# Altium PCB v29_test.PcbDoc
Units mm, origin at the board's own origin, x right, y up, seen from the top; angles counter-clockwise.
Board outline 76.2 x 76.2 mm, 2 copper layers (Top Layer, Bottom Layer), stack 1.214 mm thick; 54 components, 31 nets, 194 pads, 85 vias.
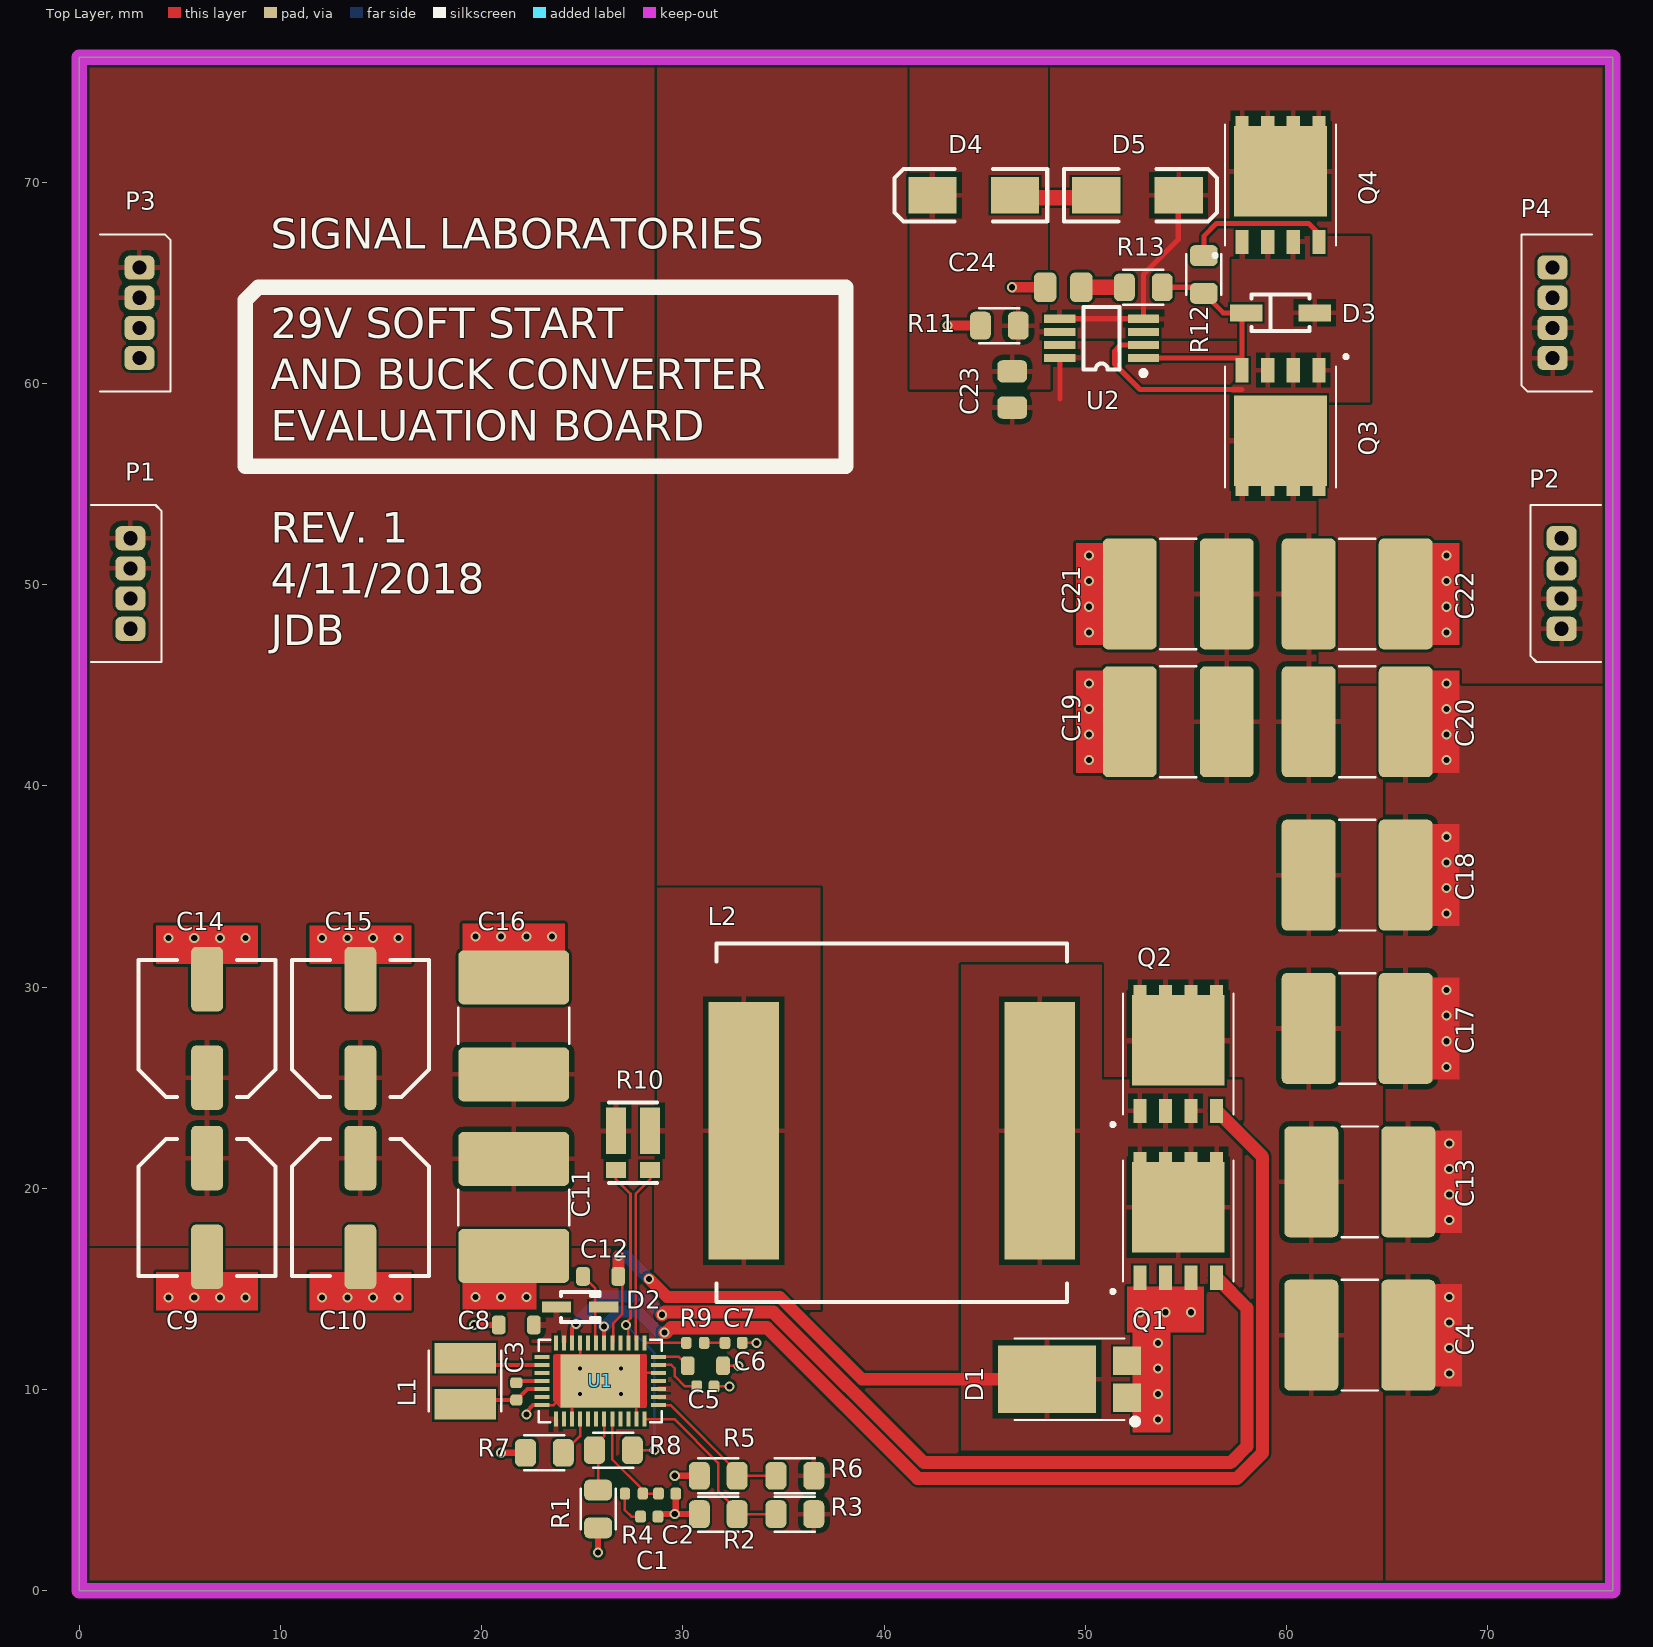
[diagram p0: Top Layer view]
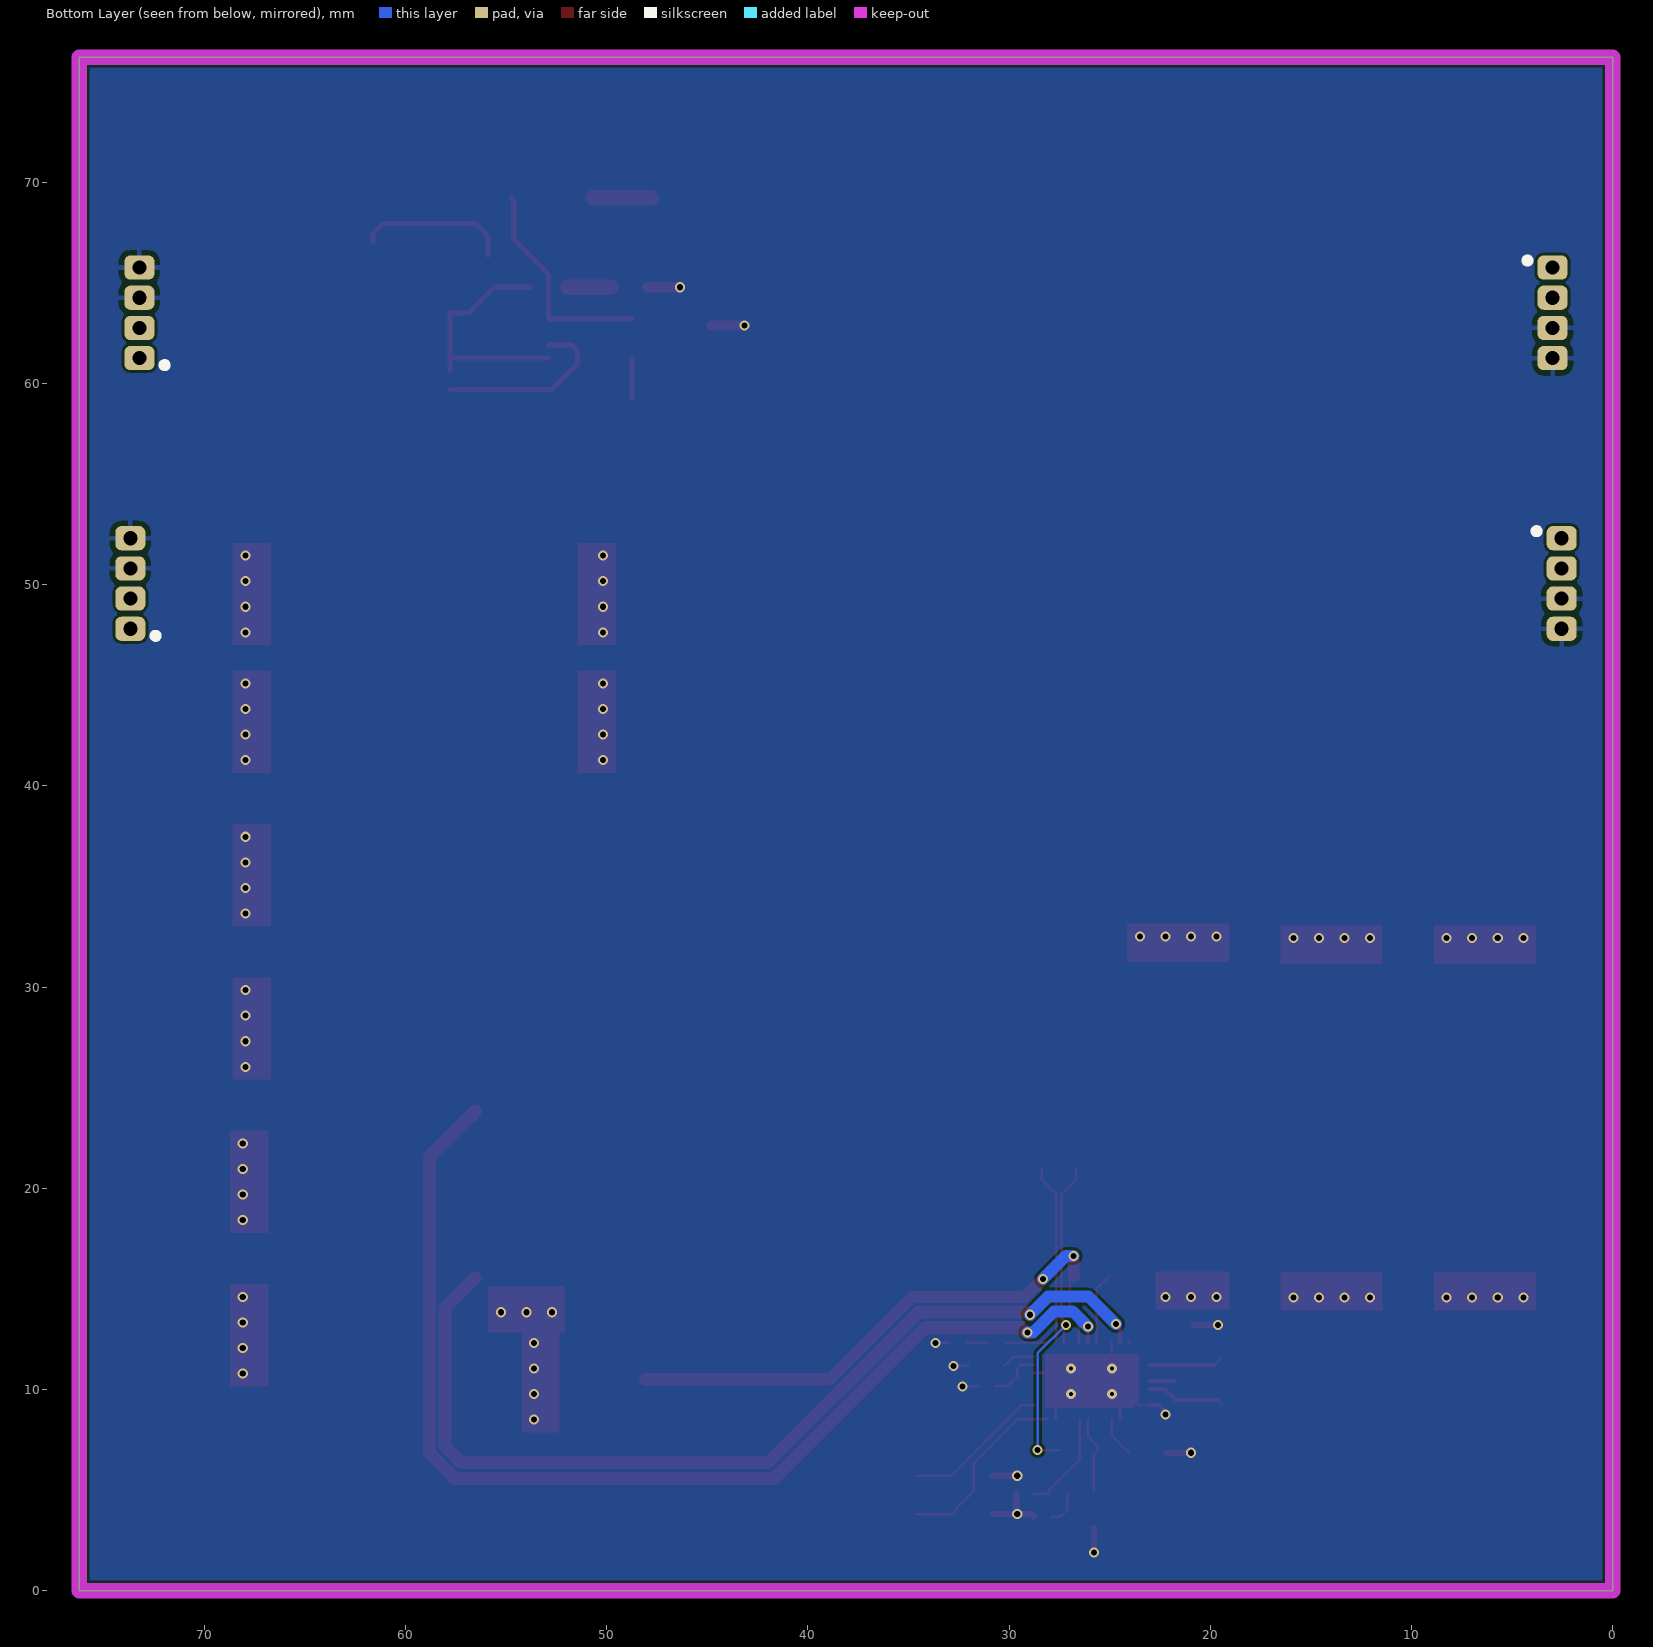
[diagram p1: Bottom Layer view, seen from below]
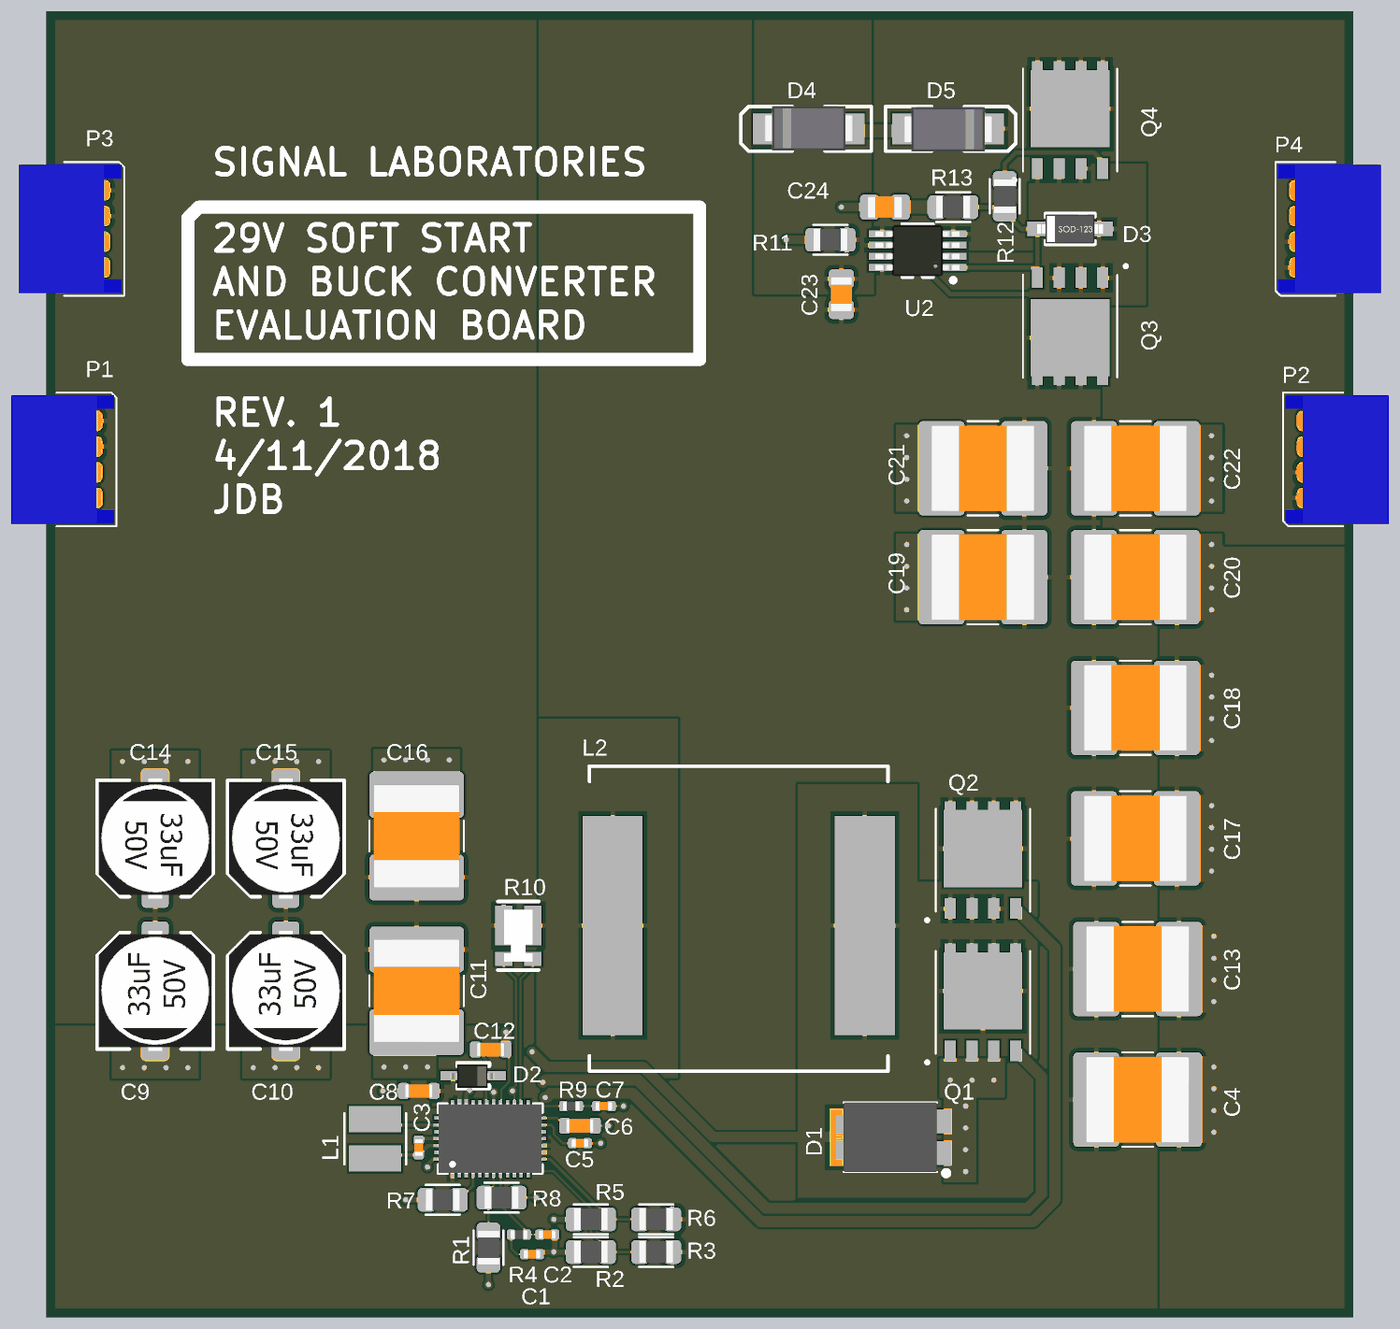
[diagram p2: 3D render of the assembled board from above, using the file's embedded part models]

## Layer stack, top to bottom
Top Solder: solder mask 0.0102, Solder Resist, Dk 3.5
Top Layer: signal copper 0.0356
Dielectric1: core 1.143, FR-4, Dk 4.8
Bottom Layer: signal copper 0.0356
Bottom Solder: solder mask 0.0102, Solder Resist, Dk 3.5

## Board outline
0,0 76.2,0 76.2,76.2 0,76.2

## Design rules (kind name [scope] priority, off if disabled: settings)
Clearance [All] p1: gap=0.127 ignorepadtopadclearanceinfootprint=FALSE except(0: Arc-Hole Track-Hole SMDPad-Hole THPad-Hole Via-Hole Fill-Hole Poly-Hole Region-Hole Text-Hole)
ComponentClearance [All] p1 off: gap=0.254 collisioncheckmode=3 verticalgap=0.254 showdistances=FALSE
DiffPairsRouting [All] p1: maxlimit=0.254 minlimit=0.127 mostfreqgap=0.127 toplayer_minwidth=0.127 toplayer_maxwidth=0.381 toplayer_prefwidth=0.127 bottomlayer_minwidth=0.127 bottomlayer_maxwidth=0.381 bottomlayer_prefwidth=0.127 maxuncoupledlength=12.7
HoleSize [All] p1: absolutevalues=TRUE maxlimit=25.4 minlimit=0.2 maxpercent=80.000 minpercent=20.000
MinimumSolderMaskSliver [All] p1: minsoldermaskwidth=0.1
PolygonConnect PolygonConnect_1 [IsVia] p1: connectstyle=Direct reliefconductorwidth=0.254 reliefentries=4 polygonreliefangle="90 Angle" airgapwidth=0.254
PolygonConnect [All] p2: connectstyle=Relief reliefconductorwidth=0.254 reliefentries=4 polygonreliefangle="90 Angle" airgapwidth=0.254
RoutingVias [All] p1: holewidth=0.2 width=0.5 viastyle="Through Hole" minholewidth=0.2 minwidth=0.5 maxholewidth=0.711 maxwidth=1.27
SilkToSilkClearance [All] p1 off: silktosilkclearance=0.254
SilkToSolderMaskClearance SilkscreenOverComponentPads [IsPad] p1 off: minsilkscreentomaskgap=0.254 clearancetoexposedcopper=TRUE
SolderMaskExpansion [All] p1: expansion=0.05
Width [All] p1: maxlimit=500 minlimit=0.127 preferedwidth=0.127
24 further rules are at their usual default settings.

## Classes and differential pairs
differential pair SENSE: +SENSE_P -SENSE_N

## Components (designator, comment, footprint, x,y, rotation, side; value= is the part's Value field where it differs from the comment)
C1 "GRM1555C1H102JA01" CAPC100X50X55L25N 28.321,3.683 r0 top value=1nF (schematic designator C21)
C2 "GRM1555C1H101JA01" CAPC100X50X55L25N 29.21,4.826 r180 top value=100pF (schematic designator C20)
C3 "GRM155R61A105KE15" CAPC100X50X55L25N 21.717,9.906 r90 top value=1uF (schematic designator C11)
C4 "CKG57NX7S2A226M500JJ" CAPC600X500X500L160N 63.63,12.7 r180 top value=22uF (schematic designator C2)
C5 "C0402C222J3GACTU" CAPC100X50X55L25N 31.115,10.16 r0 top value=2.2nF (schematic designator C22)
C6 "VJ0402A101KXA" CAPC160X80X90L20N 31.115,11.176 r0 top value=100pF (schematic designator C23)
C7 "GRM155R71H471JA01" CAPC100X50X55L25N 32.512,12.319 r180 top value=470pF (schematic designator C24)
C8 "TMK212B7475KG" CAPC160X80X90L20N 21.717,13.208 r180 top value=4.7uF (schematic designator C12)
C9 "EEE-FTH101XAP" CAPAE660X800D700L260X65N 6.35,19.05 r270 top value=100uF (schematic designator C16)
C10 "EEE-FTH101XAP" CAPAE660X800D700L260X65N 13.97,19.05 r270 top value=100uF (schematic designator C19)
C11 "CKG57NX7S1H226M500JJ" CAPC600X500X500L160N 21.59,19.05 r90 top value=22uF (schematic designator C15)
C12 "UMK212B7105KG" CAPC160X80X90L20N 25.908,15.621 r0 top value=1uF (schematic designator C13)
C13 "CKG57NX7S2A226M500JJ" CAPC600X500X500L160N 63.63,20.32 r180 top value=22uF (schematic designator C5)
C14 "EEE-FTH101XAP" CAPAE660X800D700L260X65N 6.35,27.94 r90 top value=100uF (schematic designator C17)
C15 "EEE-FTH101XAP" CAPAE660X800D700L260X65N 13.97,27.94 r90 top value=100uF (schematic designator C18)
C16 "CKG57NX7S1H226M500JJ" CAPC600X500X500L160N 21.59,28.07 r270 top value=22uF (schematic designator C14)
C17 "CKG57NX7S2A226M500JJ" CAPC600X500X500L160N 63.5,27.94 r180 top value=22uF (schematic designator C4)
C18 "CKG57NX7S2A226M500JJ" CAPC600X500X500L160N 63.5,35.56 r180 top value=22uF (schematic designator C9)
C19 "CKG57NX7S2A226M500JJ" CAPC600X500X500L160N 54.61,43.18 r0 top value=22uF (schematic designator C8)
C20 "CKG57NX7S2A226M500JJ" CAPC600X500X500L160N 63.5,43.18 r180 top value=22uF (schematic designator C6)
C21 "CKG57NX7S2A226M500JJ" CAPC600X500X500L160N 54.61,49.53 r0 top value=22uF (schematic designator C3)
C22 "CKG57NX7S2A226M500JJ" CAPC600X500X500L160N 63.5,49.53 r180 top value=22uF (schematic designator C7)
C23 "VJ0805Y473KXB" CAPC200X125X145L45N 46.355,59.69 r90 top value=47nF (schematic designator C1)
C24 "VJ0805Y473KXB" CAPC200X125X145L45N 48.895,64.77 r180 top value=47nF (schematic designator C10)
D1 "SBR10U200P5-13" DIODES_POWERDI5 49.214,10.51 r90 top (schematic designator D5)
D2 "1N4448HWS-7-F" SOD323 24.892,14.097 r0 top (schematic designator D4)
D3 "DDZ12BQ-7" SOD123 59.69,63.5 r180 top (schematic designator D2)
D4 "SMAJ24A-13-F" SMA 44.45,69.342 r180 top (schematic designator D3)
D5 "SMAT70A-13-F" SMA 52.578,69.342 r0 top (schematic designator D1)
L1 "ME3220-333KL" ME3220 19.177,10.414 r90 top value=33uH
L2 "HCM1A1707-680-R" HCM1A1707 40.37,23.26 r180 top value=68uH
P1 "S4B-ZR" S4B-ZR 2.09,50.05 r90 top (schematic designator P3)
P2 "S4B-ZR" S4B-ZR 74.11,50.05 r270 top
P3 "S4B-ZR" S4B-ZR 2.54,63.5 r90 top (schematic designator P4)
P4 "S4B-ZR" S4B-ZR 73.66,63.5 r270 top (schematic designator P1)
Q1 "BSC190N15NS3" TDSON-8 54.61,18.375 r0 top (schematic designator Q4)
Q2 "BSC190N15NS3" TDSON-8 54.61,26.67 r0 top (schematic designator Q3)
Q3 "BSC190N15NS3" TDSON-8 59.69,57.825 r180 top (schematic designator Q2)
Q4 "BSC190N15NS3" TDSON-8 59.69,69.85 r0 top (schematic designator Q1)
R1 "RT0805BRD0711K5L" RESC2012X70N 25.781,4.064 r90 top value=11.5k (schematic designator R11)
R2 "RG2012P-103-B-T5" RESC2012X70N 31.75,3.81 r0 top value=10k (schematic designator R7)
R3 "RT0805BRD07430KL" RESC2012X70N 35.56,3.81 r0 top value=430k (schematic designator R4)
R4 "ERJ-2RKF2212X" RESC1005X40N 27.559,4.826 r0 top value=22.1K (schematic designator R12)
R5 "RG2012P-153-B-T5" RESC2012X70N 31.75,5.715 r0 top value=15k (schematic designator R8)
R6 "RT0805BRD07357KL" RESC2012X70N 35.56,5.715 r0 top value=357k (schematic designator R5)
R7 "RT0805BRD0749R9L" RESC2012X70N 23.114,6.858 r180 top value=49.9 (schematic designator R10)
R8 "PTN0805E2553BST1" RESC2012X70N 26.543,6.985 r180 top value=255k (schematic designator R9)
R9 "ERJ-2RKF2672X" RESC1005X40N 30.607,12.319 r0 top value=26.7K (schematic designator R13)
R10 "CST0612-FC-R002E" CST0612 27.52,22.26 r0 top value=0.002 (schematic designator R6)
R11 "RC0805FR-071KL" RESC2012X70N 45.72,62.865 r0 top value=1k (schematic designator R3)
R12 "RC0805FR-0710RL" RESC2012X70N 55.88,65.405 r90 top value=10 (schematic designator R1)
R13 "RC0805FR-0710KL" RESC2012X70N 52.875,64.77 r0 top value=10k (schematic designator R2)
U1 "LT3840EUFE" QFN39P40_600X400X80L40X20T465X265N 25.886,10.424 r0 top (schematic designator U2)
U2 "LTC4359HMS8" MSOP8 50.8,62.23 r90 top (schematic designator U1)

## Footprints (in the part's own frame and the unit in brackets; to place one, negate y for a bottom-side part, rotate by r counter-clockwise, add the part's x,y. Pads: shape width x height; smd on the part's side, far side on the other; paste and mask are expansions set on the pad)
CAPAE660X800D700L260X65N [mm] "Capacitor, Aluminum Electrolytic; 6.60 mm L X 6.60 mm W X 8.00 mm H body"
  rrect32% 3.21x1.58 smd: 1(-2.45,0) 2(2.45,0)
  silkscreen extent -3.4,-3.4 3.4,3.4, body extent -3.5,-3.3 3.5,3.3, height 8.54
CAPC100X50X55L25N [mm] "Capacitor, Chip; 1.00 mm L X 0.50 mm W X 0.55 mm H body"
  rrect52% 0.54x0.6 smd: 1(-0.43,0) 2(0.43,0)
  body extent -0.5,-0.25 0.5,0.25, height 0.55
CAPC160X80X90L20N [mm] "Capacitor, Chip; 1.60 mm L X 0.80 mm W X 0.90 mm H body"
  rrect50% 0.68x0.93 smd: 1(-0.875,0) 2(0.875,0)
  body extent -0.8,-0.4 0.8,0.4, height 0.9
CAPC200X125X145L45N [mm] "Capacitor, Chip; 2.00 mm L X 1.25 mm W X 1.45 mm H body"
  rrect45% 1.11x1.47 smd: 1(-0.9,0) 2(0.9,0)
  body extent -1,-0.63 1,0.63, height 1.45
CAPC600X500X500L160N [mm] "Capacitor, Chip; 6.00 mm L X 5.00 mm W X 5.00 mm H body"
  rrect19% 2.68x5.51 smd: 1(-2.41,0) 2(2.41,0)
  silkscreen extent -0.89,-2.75 0.89,2.75, body extent -3,-2.5 3,2.5, height 5
CST0612 [mm] "Current Sense Resistor"
  rect 1x2.3 smd mask+0.05: 1(-0.85,0.6) 2(0.85,0.6)
  rect 1x0.8 smd mask+0.05: 3(-0.85,-1.35) 4(0.85,-1.35)
  silkscreen extent -1.2,-2 1.2,2, body extent -0.82,-1.53 0.82,1.52, height 0.65
DIODES_POWERDI5 [mm] "Recifier; 2 pin, 4.05 mm L X 5.45 mm W X 1.15 mm H body"
  rect 1.4x1.39 smd mask+0.05: A(-0.92,-2.856) A(0.92,-2.856)
  rect 3.36x4.86 smd paste-4.86 mask+0: K(0,1.126)
  silkscreen extent -2.25,-3.4 2.02,2.73, body extent -2.02,-2.72 2.02,2.73, height 1.15
HCM1A1707 [mm] "Inductor, Powdered Iron, SMD"
  rect 3.5x12.8 smd: 1(-7.35,0.4) 2(7.35,0.4)
  silkscreen extent -8.7,-8.9 8.7,8.9, body extent -8.42,-8.6 8.42,8.6, height 7
ME3220 [mm] "SMT Power Inductor"
  rect 1.52x3.05 smd mask+0.05: 1(-1.145,0) 2(1.145,0)
  silkscreen extent -1.5,-1.8 1.5,1.8, body extent -1.6,-1.4 1.6,1.4, height 2
MSOP8 [mm] "MSOP8"
  rect 0.4x1.55 smd: 1(-0.975,-2.075) 2(-0.325,-2.075) 3(0.325,-2.075) 4(0.975,-2.075) 5(0.975,2.075) 6(0.325,2.075) 7(-0.325,2.075) 8(-0.975,2.075)
  silkscreen extent -1.85,-2.2 1.55,0.9, body extent -1.5,-2.45 1.5,2.45, height 1.15
QFN39P40_600X400X80L40X20T465X265N [mm] "Quad Flat No-Lead (QFN with Tab), 0.40 mm pitch; rect., 12 pin X 7 pin, 6.00 mm L X 4.00 mm W X 0.80 mm H body"
  rect 0.2x0.74 smd mask+0.05: 1(-2.2,-1.895) 2(-1.8,-1.895) 3(-1.4,-1.895) 4(-1,-1.895) 5(-0.6,-1.895) 6(-0.2,-1.895) 7(0.2,-1.895) 8(0.6,-1.895) 9(1,-1.895) 10(1.4,-1.895) 11(1.8,-1.895) 12(2.2,-1.895) 20(2.2,1.895) 21(1.8,1.895) 22(1.4,1.895) 23(1,1.895) 24(0.6,1.895) 25(0.2,1.895) 26(-0.2,1.895) 27(-0.6,1.895) 28(-1,1.895) 29(-1.4,1.895) 30(-1.8,1.895) 31(-2.2,1.895)
  rect 0.74x0.2 smd mask+0.05: 13(2.895,-1.2) 14(2.895,-0.8) 15(2.895,-0.4) 16(2.895,0) 17(2.895,0.4) 18(2.895,0.8) 19(2.895,1.2) 32(-2.895,1.2) 33(-2.895,0.8) 34(-2.895,0.4) 35(-2.895,0) 36(-2.895,-0.4) 37(-2.895,-0.8) 38(-2.895,-1.2)
  rect 3.95x2.65 smd paste-3.95 mask+0: 39(0,0)
  Top Layer region: 2.325,0 2.325,-1.225 2.324,-1.241 2.32,-1.256 2.314,-1.27 2.306,-1.284 2.296,-1.296 2.284,-1.306 2.27,-1.314 2.256,-1.32 2.241,-1.324 -1.975,-1.325 -2.325,-0.975 -2.325,1.225 -2.324,1.241 -2.32,1.256 -2.314,1.27 -2.306,1.284 -2.296,1.296 -2.284,1.306 -2.27,1.314 -2.256,1.32 -2.241,1.324 2.225,1.325 2.241,1.324 2.256,1.32 2.27,1.314 2.284,1.306 2.296,1.296 2.306,1.284 2.314,1.27 2.32,1.256 2.324,1.241 2.325,1.225 2.325,0
  silkscreen extent -3.05,-2.05 3.05,2.05, body extent -3.05,-2.05 3.05,2.05, height 0.8
RESC1005X40N [mm] "Resistor, Chip; 1.00 mm L X 0.50 mm W X 0.40 mm H body"
  rrect50% 0.51x0.6 smd: 1(-0.445,0) 2(0.445,0)
  body extent -0.5,-0.25 0.5,0.25, height 0.4
RESC2012X70N [mm] "Resistor, Chip; 2.00 mm L X 1.25 mm W X 0.70 mm H body"
  rrect50% 1.04x1.38 smd: 1(-0.94,0) 2(0.94,0)
  silkscreen extent -1,-0.87 1,0.87, body extent -1,-0.63 1,0.63, height 0.7
S4B-ZR [mm] "1.5mm pitch right angle 4-position"
  rrect50% 1.2x1.5 hole 0.7 paste-1.5 mask+0.05: 1(2.25,-0.45) 2(0.75,-0.45) 3(-0.75,-0.45) 4(-2.25,-0.45)
  silkscreen extent -3.9,-2 3.9,1.5, body extent -3.75,-1.85 3.75,4.15, height 3.7
SMA [mm] "DO-214-AC/SMA; 2 C-Bend Leads; Body 5 x 2.7 mm, inc. leads (LxW)"
  rect 2.4x1.8 smd: 1(-2.05,0) 2(2.05,0)
  silkscreen extent -3.65,-1.3 3.95,1.3, body extent -2.6,-1.33 2.6,1.27, height 2.4
SOD123 [mm] "SOD-123; 2 Leads; Body 2.7 x 1.6 mm, (LxW)"
  rect 1.6x0.85 smd: 1(-1.7,0) 2(1.7,0)
  silkscreen extent -1.45,-0.9 1.45,0.9, body extent -1.92,-0.85 1.92,0.85, height 1.45
SOD323 [mm] "SOD-323/SC-76; 2 Leads; Body 1.7 x 1.3 mm, (LxW)"
  rect 1.45x0.55 smd: A(-1.175,0) K(1.175,0)
  silkscreen extent -0.95,-0.75 0.95,0.75, body extent -1.35,-0.7 1.25,0.65, height 1.1
TDSON-8 [mm] "Power FET Package 5x6mm TDSON-8"
  rect 0.65x1.2 smd: 1(-1.905,-2.825) 2(-0.635,-2.825) 3(0.635,-2.825) 4(1.905,-2.825) 5(1.905,2.825) 5(1.905,2.825) 6(0.635,2.825) 7(-0.635,2.825) 8(-1.905,2.825)
  rect 4.6x4.5 smd: 9(0,0.675)
  silkscreen extent -3.3,-3.55 2.75,3, body extent -2.5,-3 2.5,3, height 1

## Part data
C1: library part CAP, "Ceramic Capacitor 1nF ±5% 50V NP0 0402", Manufacturer=Murata, Package=0402, Tolerance=±5%, Voltage=50V, Manufacturer P/N=GRM1555C1H102JA01, Tr=-55:125
C2: library part CAP, "Ceramic Capacitor 100pF ±5% 50V NP0 0402", Manufacturer=Murata, Package=0402, Tolerance=±5%, Voltage=50V, Manufacturer P/N=GRM1555C1H101JA01, Tr=-55:125
C3: library part CAP, "Ceramic Capacitor 1uF ±10% 10V X5R 0402", Manufacturer=Murata, Package=0402, Tolerance=±10%, Voltage=10V, Manufacturer P/N=GRM155R61A105KE15, Tr=-55:125
C4 C13 C17 C18 C19 C20 C21 C22: library part CAP, "Ceramic Capacitor 22uF ±20% 100V X7S Stacked", Manufacturer=TDK, Package=2220, Tolerance=±20%, Voltage=100V, Manufacturer P/N=CKG57NX7S2A226M500JJ, Tr=-55:125
C5: library part CAP, "Ceramic Capacitor 2.2nF ±5% 25V NP0 0402", Manufacturer=Kemet, Package=0402, Tolerance=±5%, Voltage=25V, Manufacturer P/N=C0402C222J3GACTU, Tr=-55:125
C6: "Ceramic Capacitor 100pF ±10% 50V C0G 0402", Manufacturer=Vishay, Package=0402, Tolerance=±10%, Voltage=50V, Manufacturer P/N=VJ0402A101KXA, pF=100, Tr=-55:150
C7: library part CAP, "Ceramic Capacitor 470pF ±5% 50V X7R 0402", Manufacturer=Murata, Package=0402, Tolerance=±5%, Voltage=50V, Manufacturer P/N=GRM155R71H471JA01, Tr=-55:125
C8: "Ceramic Capacitor 4.7uF ±10% 25V X7R 0805", Manufacturer="Taiyo Yuden", Package=0805, Tolerance=±10%, Voltage=25V, Manufacturer P/N=TMK212B7475KG, Notes="stock needs validation", pF=4700000
C9 C10 C14 C15: library part CAP_POL, "Aluminum Electrolytic Capacitor 100uF ±20% 50V", Manufacturer=Panasonic, Package="6.3mm Radial", Tolerance=±20%, Voltage=50V, Manufacturer P/N=EEE-FTH101XAP, Tr=-55:105
C11 C16: library part CAP, "Ceramic Capacitor 22uF ±20% 50V X7S Stacked", Manufacturer=TDK, Package=2220, Tolerance=±20%, Voltage=50V, Manufacturer P/N=CKG57NX7S1H226M500JJ, Tr=-55:125
C12: "Ceramic Capacitor 1uF ±10% 50V X7R 0805", Manufacturer="Taiyo Yuden", Package=0805, Tolerance=±10%, Voltage=50V, Manufacturer P/N=UMK212B7105KG, pF=1000000
C23 C24: "Ceramic Capacitor 47nF ±10% 100V X7R 0805", Manufacturer=Vishay, Package=0805, Tolerance=±10%, Voltage=100V, Manufacturer P/N=VJ0805Y473KXB, pF=47000, Tr=-55:150
D1: library part PDS5100H, "Schottky Diode 200V 10A SMD", Current=10A, Manufacturer="Diodes Inc", Reverse Voltage (max)=200V, Manufacturer P/N=SBR10U200P5-13
D2: "Schottky Diode 80V 250mA SOD323", Manufacturer="Diodes, Inc.", Package=SOD323, Alternative P/N=1N4448, Manufacturer P/N=1N4448HWS-7-F
D3: library part ZENER, Manufacturer="Diodes, Inc.", Package=SOD-123, Manufacturer P/N=DDZ12BQ-7, Vz=12V
D4: library part TVS, "TVS Diode 24V/38.9V SMA", Manufacturer="Diodes, Inc.", Manufacturer P/N=SMAJ24A-13-F, Vz=24V
D5: library part TVS, "TVS Diode 70V/100V SMA", Manufacturer="Diodes, Inc.", Manufacturer P/N=SMAT70A-13-F, Vz=70V
L1: library part COIL, "Wirewound Power Inductor 33uH ±10% 500mA SMD", Manufacturer=Coilcraft, Tolerance=±10%, I(sat)=500mA, Manufacturer P/N=ME3220-333KL, Tr=-40:85
L2: library part COIL, "Fixed Inductor 68uH, 6A(sat), SMD", Manufacturer=Eaton, I(sat)=6A, Manufacturer P/N=HCM1A1707-680-R
P1 P2 P3 P4: "1.5mm pitch right angle 6-position", Manufacturer=JST, Manufacturer P/N=S4B-ZR
Q1 Q2 Q3 Q4: "MOSFET N-Channel Enhancement Mode", Manufacturer=Infineon, Id(max)=50A, Manufacturer P/N=BSC190N15NS3, Rds(on)=19mOhm, Vds(max)=150V
R1: library part RES, "Thin Film Resistor 11.5k +/-0.1% SMD 0805", Manufacturer=Yageo, Package=0805, Tolerance="+/- 0.1%", Manufacturer P/N=RT0805BRD0711K5L, Tr=-55:155
R2: library part RES, "Thin Film Resistor 10k +/-0.1% SMD 0805", Manufacturer=Susumu, Package=0805, Tolerance="+/- 0.1%", Manufacturer P/N=RG2012P-103-B-T5, Tr=-55:155
R3: library part RES, "Thin Film Resistor 430k +/-0.1% SMD 0805", Manufacturer=Yageo, Package=0805, Tolerance="+/- 0.1%", Manufacturer P/N=RT0805BRD07430KL, Tr=-55:155
R4: library part "RES 0402", "Thick Film Resistor 22.1k ±1% 0402", Manufacturer=Panasonic, Package=0402, Tolerance=±1%, Manufacturer P/N=ERJ-2RKF2212X, Tr=-55:155
R5: library part RES, "Thin Film Resistor 15k +/-0.1% SMD 0805", Manufacturer=Susumu, Package=0805, Tolerance="+/- 0.1%", Manufacturer P/N=RG2012P-153-B-T5, Tr=-55:155
R6: library part RES, "Thin Film Resistor 357k +/-0.1% SMD 0805", Manufacturer=Yageo, Package=0805, Tolerance="+/- 0.1%", Manufacturer P/N=RT0805BRD07357KL, Tr=-55:155
R7: library part RES, "Thin Film Resistor 49 +/-0.1% SMD 0805", Manufacturer=Yageo, Package=0805, Tolerance="+/- 0.1%", Manufacturer P/N=RT0805BRD0749R9L, Tr=-55:155
R8: library part RES, "Thin Film Resistor 255k +/-0.1% SMD 0805", Manufacturer=Vishay, Package=0805, Tolerance="+/- 0.1%", Manufacturer P/N=PTN0805E2553BST1, Tr=-55:155
R9: library part "RES 0402", "Thick Film Resistor 26.7k ±1% 0402", Manufacturer=Panasonic, Package=0402, Tolerance=±1%, Manufacturer P/N=ERJ-2RKF2672X, Tr=-55:155
R10: "Current Sense Resistor 10 Ohms +/-1% SMD 4-Terminal", Manufacturer=Bourns, Tolerance=+/-1%, Manufacturer P/N=CST0612-FC-R002E, Tr=-55:+170
R11: library part RES, "Thin Film Resistor 1k +/-1% SMD 0805", Manufacturer=Yageo, Package=0805, Tolerance="+/- 1%", Voltage=150V, Manufacturer P/N=RC0805FR-071KL, Tr=-55:155
R12: library part RES, "Thin Film Resistor 10 +/-1% SMD 0805", Manufacturer=Yageo, Package=0805, Tolerance="+/- 1%", Voltage=150V, Manufacturer P/N=RC0805FR-0710RL, Tr=-55:155
R13: library part RES, "Thin Film Resistor 10k +/-1% SMD 0805", Manufacturer=Yageo, Package=0805, Tolerance="+/- 1%", Voltage=150V, Manufacturer P/N=RC0805FR-0710KL, Tr=-55:155
U1: "Synchronous Regulator Controller", Manufacturer="Linear Technologies", Alternative P/N=LT3840IUFE, Manufacturer P/N=LT3840EUFE
U2: "Ideal Diode Controller", Manufacturer="Linear Technology", Manufacturer P/N=LTC4359HMS8

## Via types
v1: diameter 0.5, hole 0.3, Top Layer to Bottom Layer, tented top, 81 vias
v2: diameter 0.5, hole 0.2, Top Layer to Bottom Layer, tented top, 4 vias

## Nets (pads, with @x,y where several pads share a name; then routed paths per layer and width w, separated by ;. In a path a pad name is that pad's centre, name@x,y a point inside that pad or via, vN(x,y) a via of type N, cw(c..) or ccw(c..) an arc to the next point about the centre after c; other vN are vias at no path point)
GND: C1.2 C2.1 C4.1 C5.2 C6.2 C7.1 C8.2 C9.2 C10.2 C11.1 C13.1 C14.2 C15.2 C16.1 C17.1 C18.1 C19.1 C20.1 C21.1 C22.1 C24.2 D1.A P1.3 P1.4 P2.3 P2.4 P3.3 P3.4 P4.3 P4.4 Q1.1 Q1.2 Q1.3 R1.1 R2.1 R5.1 R7.2 R11.1 U1.3 U1.11 U1.17 U1.28 U1.38 U1.39 | length 18.8
  Top Layer w0.127: U1.38 23.575,9.224 23.749,9.398 ; U1.3 U1.39@24.486,9.398 ; U1.39@24.886,11.45 U1.28 ; U1.11 U1.39@27.686,9.398 ; 27.912,10.824 U1.17 ; C5.2 v1(32.321,10.16) ; C6.2 v1(32.766,11.176) ; C7.1 v1(33.655,12.319)
  Top Layer w0.2: v1@22.225,8.89 22.559,9.224 U1.38
  Top Layer w0.3: v1(19.623,13.208) C8.2 ; v1(20.955,6.858) R7.2 ; v1(25.781,1.905) R1.1 ; C1.2 28.878,3.81 v1(29.591,3.81) ; v1(29.591,5.715) R5.1 ; C2.1 29.64,3.859 v1(29.591,3.81) ; R2.1 v1(29.591,3.81)
  Top Layer w0.5: v1(43.14,62.865) R11.1 ; v1(46.355,64.77) C24.2
  other v1: 53.597,8.509 22.225,8.763 53.597,9.779 68.075,10.795 53.597,11.049 68.075,12.065 53.597,12.319 68.075,13.335 52.705,13.84 53.975,13.84 55.245,13.84 4.445,14.565 5.715,14.565 6.985,14.565 8.255,14.565 12.065,14.565 13.335,14.565 14.605,14.565 15.875,14.565 19.685,14.605 20.955,14.605 22.225,14.605 68.075,14.605 68.075,18.415 68.075,19.685 68.075,20.955 68.075,22.225 67.945,26.035 67.945,27.305 67.945,28.575 67.945,29.845 4.445,32.425 5.715,32.425 6.985,32.425 8.255,32.425 12.065,32.425 13.335,32.425 14.605,32.425 15.875,32.425 19.685,32.515 20.955,32.515 22.225,32.515 23.495,32.515 67.945,33.655 67.945,34.925 67.945,36.195 67.945,37.465 50.165,41.275 67.945,41.275 50.165,42.545 67.945,42.545 50.165,43.815 67.945,43.815 50.165,45.085 67.945,45.085 50.165,47.625 67.945,47.625 50.165,48.895 67.945,48.895 50.165,50.165 67.945,50.165 50.165,51.435 67.945,51.435
  other v2: 24.892,9.779 26.924,9.779 24.892,11.049 26.924,11.049
INTVCC: C8.1 D2.A U1.30 | length 0.1
  Top Layer w0.127: U1.30@24.046,12.36 U1.30
NetC1_2: C23.2 D4.2 R11.2 U2.6
NetC10_1: C24.1 R13.1 | length 2.1
  Top Layer w0.762: C24.1 R13.1
NetC11_1: C3.1 L1.1 U1.36 | length 3.9
  Top Layer w0.127: L1.1@19.431,9.269 L1.1@19.638,9.476
  Top Layer w0.2: L1.1@19.638,9.476 C3.1 22.265,10.024 U1.36
NetC11_2: C3.2 U1.35 | length 1.3
  Top Layer w0.127: C3.2 C3.2@21.805,10.424
  Top Layer w0.2: C3.2@21.805,10.424 U1.35
NetC13_1: C12.1 D2.K U1.26 | length 3.6
  Top Layer w0.127: C12.1 25.646,15.008 25.646,12.36 U1.26
NetC13_2: C12.2 D1.K L2.1 Q1.5 Q1.6 Q1.7 Q1.8 Q1.9 Q2.1 Q2.2 Q2.3 U1.24 | length 28.4
  Top Layer w0.127: U1.24 26.527,12.36 26.527,13.287 26.982,13.743 26.982,15.422 C12.2
  Top Layer w0.6: C12.2 26.797,15.635 v1(26.797,16.637) ; v1(28.321,15.494) 29.215,14.6 34.806,14.6 38.896,10.51 D1.K
  Bottom Layer w0.6: v1(26.797,16.637) 27.178,16.637 v1(28.321,15.494)
NetC20_2: C2.2 R4.2 U1.8 | length 5.1
  Top Layer w0.127: U1.8 26.486,6.534 28.004,5.016 R4.2 C2.2
NetC21_1: C1.1 R4.1 | length 1.7
  Top Layer w0.127: R4.1 27.114,4.001 27.432,3.683 C1.1
NetC22_1: C5.1 U1.18 | length 2.6
  Top Layer w0.127: U1.18 29.416,11.224 29.591,11.049 29.591,10.668 30.099,10.16 C5.1
NetC23_1: C6.1 U1.19 | length 1.6
  Top Layer w0.127: U1.19 29.792,11.624 C6.1
NetC24_2: C7.2 R9.2 | length 1
  Top Layer w0.127: R9.2 C7.2
NetD1_1: D4.1 D5.1 | length 2.9
  Top Layer w0.762: 47.77,69.215 D5.1@50.655,69.215
NetD2_1: D3.1 Q3.1 Q3.2 Q3.3 Q4.1 Q4.2 Q4.3 U2.2 | length 9.1
  Top Layer w0.254: U2.2 51.745,61.905 51.435,61.595 51.435,60.96 52.705,59.69 57.785,59.69
NetD2_2: D3.2 Q3.4 R12.1 R13.2 U2.1 | length 12.3
  Top Layer w0.254: U2.1 57.785,61.255 ; R13.2 55.575,64.77 R12.1 56.845,63.5 57.785,63.5 57.785,61.255 ; Q3.4 57.785,61.255
NetL1_2: L1.2 U1.33 | length 3.7
  Top Layer w0.127: L1.2@19.431,11.559 L1.2@19.766,11.224
  Top Layer w0.2: L1.2@19.766,11.224 U1.33
NetL2_2: L2.2 R10.2
NetQ1_4: Q4.4 R12.2 | length 7.6
  Top Layer w0.254: R12.2 55.88,67.31 56.515,67.945 61.087,67.945 61.595,67.437 Q4.4
NetQ3_4: Q2.4 U1.25 | length 56.3
  Top Layer w0.2: U1.25 v1(26.086,13.132)
  Top Layer w0.3: v1(29.083,12.827) v1@29.087,12.831 ; Q2.4@56.515,23.495 Q2.4
  Top Layer w0.65: v1@29.083,12.835 29.173,12.835 29.41,13.071 34.173,13.071 41.656,5.588 57.531,5.588 58.801,6.858 58.801,21.559 Q2.4
  Bottom Layer w0.6: v1(26.086,13.132) 26.839,13.885 27.759,13.885 28.817,12.827 v1(29.083,12.827)
NetQ4_4: Q1.4 U1.29 | length 47.8
  Top Layer w0.2: U1.29 24.486,13.056 v1(24.68,13.25)
  Top Layer w0.65: v1(28.956,13.716) 29.088,13.848 34.495,13.848 41.978,6.365 57.209,6.365 58.024,7.18 58.024,14.041 Q1.4
  Bottom Layer w0.6: v1(24.68,13.25) 26.042,14.612 28.06,14.612 v1(28.956,13.716)
NetR4_1: R2.2 R3.1 U1.12 | length 9.4
  Top Layer w0.127: U1.12 29.571,8.529 31.75,6.35 31.75,4.953 32.69,4.013 R2.2 R3.1
NetR5_1: R5.2 R6.1 U1.13 | length 7.3
  Top Layer w0.127: U1.13 29.384,9.224 32.893,5.715 R6.1
NetR9_2: R1.2 R8.2 U1.7 | length 3.8
  Top Layer w0.127: R1.2 25.781,6.807 R8.2 25.603,7.188 26.086,7.671 U1.7
NetR10_1: R7.1 U1.4 | length 2
  Top Layer w0.127: R7.1 24.886,7.69 U1.4
NetR13_1: R9.1 U1.20 | length 2.1
  Top Layer w0.127: U1.20 R9.1
SENSE_N: R8.1 R10.3 U1.22 | length 16.9
  Top Layer w0.127: R10.3 26.67,20.446 27.393,19.723 27.393,13.55 27.178,13.335 v1(27.178,13.208) 27.286,13.1 U1.22 ; R8.1 v1(28.575,6.985)
  Bottom Layer w0.127: v1(27.178,13.208) 28.575,11.811 v1(28.575,6.985)
SENSE_P: R10.4 U1.21 | length 8.8
  Top Layer w0.127: U1.21@27.647,12.446 27.647,19.723 28.37,20.446 R10.4
V29: C9.1 C10.1 C11.2 C14.1 C15.1 C16.2 P1.1 P1.2 P3.1 P3.2 R10.1
V48: C4.2 C13.2 C17.2 C18.2 C19.2 C20.2 C21.2 C22.2 C23.1 Q2.5 Q2.6 Q2.7 Q2.8 Q2.9 Q3.5 Q3.6 Q3.7 Q3.8 Q3.9 R3.2 R6.2 U1.1 U1.14 U1.15 U2.8 | length 2
  Top Layer w0.254: 48.725,59.225 U2.8
V48_EXT: D5.2 P2.1 P2.2 P4.1 P4.2 Q4.5 Q4.6 Q4.7 Q4.8 Q4.9 U2.4 U2.5 | length 10.9
  Top Layer w0.254: U2.5 U2.4 52.875,65.405 54.61,67.14 54.61,69.07 D5.2@54.755,69.215
pads on no net: U1.2 U1.5 U1.6 U1.9 U1.10 U1.16 U1.23 U1.27 U1.31 U1.32 U1.34 U1.37 U2.3 U2.7

## Polygon pours and split planes (outlines as drawn)
NetC1_2 on Top Layer "TOP-NetC1_2" (solid, pour order 12): 41.275,76.2 48.26,76.2 48.26,59.69 41.275,59.69
GND on Top Layer "TOP-GND" (solid, pour order 18): 76.2,0 64.77,0 64.77,45.085 76.2,45.085
NetL2_2 on Top Layer "TOP-NetL2_2" (solid, pour order 2): 28.575,34.925 36.83,34.925 36.83,13.97 28.575,13.97
V29 on Top Layer "TOP-V29" (solid, remove dead copper, pour order 0): 0,76.2 28.575,76.2 28.575,17.145 0,17.145
INTVCC on Top Layer "TOP-INTVCC" (solid, pour order 4): 22.479,12.319 24.638,12.319 24.638,14.224 22.479,14.224
NetD2_1 on Top Layer "TOP-NetD2_1" (solid, pour order 8): 57.277,67.31 64.135,67.31 64.135,59.055 57.277,59.055
V48_EXT on Top Layer "TOP-V48_EXT" (solid, pour order 10): 76.2,76.2 76.2,45.085 61.595,45.085 61.595,62.23 48.26,62.23 48.26,76.2
V48 on Top Layer "TOP-V48" (solid, pour order 16): 0,76.2 64.77,76.2 64.77,0 0,0
NetC13_2 on Top Layer "TOP-NetC13_2" (solid, pour order 6): 43.815,31.115 50.8,31.115 50.8,25.4 57.785,25.4 57.785,6.985 43.815,6.985
GND on Bottom Layer "BOT-GND" (solid, pour order 20): 0,0 76.2,0 76.2,76.2 0,76.2

## Keep-outs
Keep-Out Layer:
  the board outline again, w0.762

## Other copper
Top Layer:
  rectangle net GND: 52.327,7.874 54.232,12.954
  region net GND: 16.51,31.155 16.51,33.06 11.43,33.06 11.43,31.155
  region net GND: 8.89,31.155 8.89,33.06 3.81,33.06 3.81,31.155
  region net GND: 3.81,15.835 3.81,13.93 8.89,13.93 8.89,15.835
  region net GND: 11.43,15.835 11.43,13.93 16.51,13.93 16.51,15.835
  region net GND: 19.05,15.875 19.05,13.97 22.733,13.97 22.733,15.875
  region net GND: 24.13,31.245 24.13,33.15 19.05,33.15 19.05,31.245
  region net GND: 52.07,15.11 52.07,12.827 55.88,12.827 55.88,15.11
  region net GND: 51.435,45.72 49.53,45.72 49.53,40.64 51.435,40.64
  region net GND: 51.435,52.07 49.53,52.07 49.53,46.99 51.435,46.99
  rectangle net GND: 66.805,10.16 68.71,15.24
  rectangle net GND: 66.805,17.78 68.71,22.86
  rectangle net GND: 66.675,25.4 68.58,30.48
  rectangle net GND: 66.675,33.02 68.58,38.1
  rectangle net GND: 66.675,40.64 68.58,45.72
  rectangle net GND: 66.675,46.99 68.58,52.07

## Silkscreen, mask and mechanical layers (free items; w line width, h text height)
Top Overlay:
  lines w0.762: 8.255,55.88 8.255,64.135 8.89,64.77 38.1,64.77 38.1,55.88 8.255,55.88
  text "SIGNAL LABORATORIES" at 9.525,66.675 h1.52
  text "29V SOFT START" at 9.525,62.23 h1.52
  text "AND BUCK CONVERTER" at 9.525,59.69 h1.52
  text "EVALUATION BOARD" at 9.525,57.15 h1.52
  text "REV. 1" at 9.525,52.07 h1.52
  text "4/11/2018" at 9.525,49.53 h1.52
  text "JDB" at 9.525,46.99 h1.52
Mechanical 2:
  the board outline again, w0.127
Mechanical 10:
  text "1. FRONT ASSEMBLY NOTE #1" at 52.705,134.62 h1.52
Mechanical 11:
  text "1. FRONT CONFORMAL COAT NOTE #1" at 52.705,132.715 h1.52
Mechanical 16:
  drawing of 1270 lines, arcs and shapes, not listed
  text "1" at -23.676,155.471 h1.52
  text "2" at 46.191,155.471 h1.52
  text "3" at 115.914,155.471 h1.52
  text "4" at 185.789,155.471 h1.52
  text "REV" at 103.29,150.01 h1.52
  text "DATE" at 118.53,150.01 h1.52
  text "DESC" at 131.23,150.01 h1.52
  text "ENG" at 202.35,150.01 h1.52
  text "1" at 103.29,144.93 h1.52
  text "*" at 118.53,144.93 h1.52
  text "INITIAL RELEASE" at 131.23,144.93 h1.52
  text "*" at 202.35,144.93 h1.52
  text "A" at -56.095,129.614 h1.52
  text "A" at 218.225,129.614 h1.52
  text "B" at -56.095,75.639 h1.52
  text "B" at 218.225,75.639 h1.52
  text "C" at -56.095,21.664 h1.52
  text "C" at 218.225,21.664 h1.52
  text "ENGINEER:" at 103.29,-23.98 h1.52
  text "TITLE:" at 141.39,-23.98 h1.52
  text "ALL DIMENSIONS ARE IN MM (INCHES)" at 32.805,-25.885 h1.52
  text "Brinton Engineering LLC" at 69,-25.885 h1.52
  text "*" at 103.29,-27.155 h1.52
  text "3479 Edison Way" at 69,-28.425 h1.52
  text "TOLERANCES:" at 43.854,-30.076 h1.52
  text "Menlo Park CA 94025" at 69,-30.965 h1.52
  text "*" at 142.025,-30.965 h1.52
  text "PCB DESIGNER:" at 103.29,-31.473 h1.52
  text "D" at -56.095,-32.184 h1.52
  text "D" at 218.225,-32.184 h1.52
  text "DECIMALS" at 32.805,-32.87 h1.52
  text "(877) 778-8435" at 69,-33.505 h1.52
  text "*" at 103.29,-34.775 h1.52
  text ".X     0.1" at 32.805,-36.045 h1.52
  text ".XX    0.05" at 32.805,-38.585 h1.52
  text "DATE:" at 103.29,-39.22 h1.52
  text "PART NO.:" at 141.39,-39.22 h1.52
  text "REV:" at 194.73,-39.22 h1.52
  text ".XXX   0.005" at 32.805,-41.125 h1.52
  text "*" at 103.29,-42.395 h1.52
  text "-" at 141.39,-42.395 h1.52
  text "1" at 194.73,-42.395 h1.52
  text "*UNLESS OTHERWISE NOTED" at 32.17,-46.84 h1.52
  text "FILE NAME:" at 103.29,-46.84 h1.52
  text "DWG NO:" at 141.39,-46.84 h1.52
  text "SCALE:" at 194.73,-46.84 h1.52
  text ".PCB_FILE_NAME_NO_PATH" at 104.56,-49.888 h1.52
  text "-" at 141.39,-50.015 h1.52
  text "1:1" at 194.73,-50.015 h1.52
  text "1" at -23.676,-55.349 h1.52
  text "2" at 46.191,-55.349 h1.52
  text "3" at 115.914,-55.349 h1.52
  text "4" at 185.789,-55.349 h1.52
Drill Drawing:
  lines w0.125: -19.39,121.06 -18.12,122.33 ; -19.39,123.6 -18.12,124.87 ; -18.12,121.06 -16.85,122.33 ; -18.12,123.6 -16.85,124.87 ; -16.85,121.06 -15.58,122.33 ; -16.85,123.6 -15.58,124.87 ; -15.58,121.06 -14.31,122.33 ; -15.58,123.6 -14.31,124.87 ; -14.31,121.06 -13.04,122.33 ; -14.31,123.6 -13.04,124.87 ; -13.04,121.06 -11.77,122.33 ; -13.04,123.6 -11.77,124.87 ; -11.77,121.06 -10.5,122.33 ; -11.77,123.6 -10.5,124.87 ; -10.5,121.06 -9.23,122.33 ; -10.5,123.6 -9.23,124.87 ; -9.23,121.06 -7.96,122.33 ; -9.23,123.6 -7.96,124.87 ; -7.96,121.06 -6.69,122.33 ; -7.96,123.6 -6.69,124.87
  lines w0.254: -48.6,114.075 -48.6,136.3 19.98,136.3 19.98,114.075 ; -48.6,114.155 19.98,114.155 19.98,111.615 19.345,111.615 -4.15,111.615 -4.15,114.155 ; -48.6,116.615 19.98,116.615 ; -48.6,119.155 19.98,119.155 ; -48.6,121.695 -20.66,121.695 ; -48.6,124.235 -20.66,124.235 ; -48.6,126.775 19.98,126.775 ; -48.6,129.315 19.98,129.315 ; -48.6,132.49 19.98,132.49 ; -35.9,114.075 -35.9,136.3 ; -19.136,115.599 -18.882,115.599 ; -19.136,130.839 -18.882,130.839 ; -18.374,115.091 -18.12,115.091 ; -18.374,130.331 -18.12,130.331 ; -18.12,122.457 -7.96,122.457 ; -18.12,122.711 -7.96,122.711 ; -18.12,122.965 -7.96,122.965 ; -18.12,123.092 -7.96,123.092 ; -18.12,123.346 -7.96,123.346 ; -18.12,123.6 -18.12,122.33 ; -17.612,115.599 -17.358,115.599 ; -17.612,130.839 -17.358,130.839 ; -16.85,115.091 -16.596,115.091 ; -16.85,130.331 -16.596,130.331 ; -16.088,115.599 -15.834,115.599 ; -16.088,130.839 -15.834,130.839 ; -15.326,115.091 -15.072,115.091 ; -15.326,130.331 -15.072,130.331 ; -14.564,115.599 -14.31,115.599 ; -14.564,130.839 -14.31,130.839 ; -13.802,115.091 -13.548,115.091 ; -13.802,130.331 -13.548,130.331 ; -13.04,115.599 -12.786,115.599 ; -13.04,130.839 -12.786,130.839 ; -12.278,115.091 -12.024,115.091 ; -12.278,130.331 -12.024,130.331 ; -11.516,115.599 -11.262,115.599 ; -11.516,130.839 -11.262,130.839 ; -10.754,115.091 -10.5,115.091 ; -10.754,130.331 -10.5,130.331 ; -9.992,115.599 -9.738,115.599 ; -9.992,130.839 -9.738,130.839 ; -9.23,115.091 -8.976,115.091 ; -9.23,130.331 -8.976,130.331 ; -8.468,115.599 -8.214,115.599 ; -8.468,130.839 -8.214,130.839 ; -7.96,123.6 -7.96,122.33 ; -7.706,115.091 -7.452,115.091 ; -7.706,130.331 -7.452,130.331 ; -6.944,115.599 -6.69,115.599 ; -6.944,130.839 -6.69,130.839 ; -4.15,114.075 -4.15,136.3 ; -4.15,121.695 19.98,121.695 ; -4.15,124.235 19.98,124.235 ; -18.12,122.33 -19.39,122.33 -19.39,121.06 -6.69,121.06 -6.69,122.33 -7.96,122.33 ; -18.12,122.33 -7.96,122.33 ; -19.39,114.71 -6.69,114.71 -6.69,115.98 -19.39,115.98 -19.39,114.71 ; -19.39,117.25 -6.69,117.25 -6.69,118.52 -19.39,118.52 -19.39,117.25 ; -19.39,123.6 -6.69,123.6 -6.69,124.87 -19.39,124.87 -19.39,123.6 ; -19.39,127.41 -19.39,128.68 -6.69,128.68 -6.69,127.41 -19.39,127.41 ; -19.39,129.95 -19.39,131.22 -6.69,131.22 -6.69,129.95 -19.39,129.95
  text "LAYER" at -47.33,133.76 h1.52
  text "FINISH" at -2.88,133.76 h1.52
  text "1. LEAD-FREE HASL" at 53,132.81 h1.52
  text "2. SOLDERMASK: GREEN" at 53,130.27 h1.52
  text "SILK SCREEN" at -34.63,129.95 h1.52
  text "3. SILKSCREEN: WHITE" at 53,127.73 h1.52
  text "SOLDER MASK" at -34.63,127.41 h1.52
  text "4. NO BOTTOM SOLDERMASK" at 53,125.19 h1.52
  text "1 (TOP) S" at -47.33,124.87 h1.52
  text "COPPER (1oz.)" at -34.63,124.87 h1.52
  text "0.036 (0.0014)" at -3.515,124.87 h1.52
  text "PHENOLIC (FR-4)" at -34.63,122.33 h1.52
  text "1.57 (0.062)" at -3.515,122.33 h1.52
  text "2 (BOT) S" at -47.33,119.79 h1.52
  text "COPPER (1oz.)" at -34.63,119.79 h1.52
  text "0.036 (0.0014)" at -3.515,119.79 h1.52
  text "SOLDER MASK" at -34.63,117.25 h1.52
  text "SILK SCREEN" at -34.63,114.71 h1.52
  text "TOTAL" at -9.23,112.25 h1.52
  text "1.65 (0.065)" at -3.515,112.25 h1.52
  text ".Legend" at 102.235,111.76 h1.52
Mechanical 26:
  text "1. BOTTOM ASSEMBLY NOTE #1" at 101.6,134.62 h1.52
Mechanical 27:
  text "1. BOTTOM CONFORMAL COAT NOTE #1" at 101.6,132.715 h1.52
Mechanical 32:
  drawing of 1270 lines, arcs and shapes, not listed
  text "4" at -22.389,155.471 h1.52
  text "3" at 47.486,155.471 h1.52
  text "2" at 117.209,155.471 h1.52
  text "1" at 187.076,155.471 h1.52
  text "ENG" at -38.95,150.01 h1.52
  text "DESC" at 32.17,150.01 h1.52
  text "DATE" at 44.87,150.01 h1.52
  text "REV" at 60.11,150.01 h1.52
  text "*" at -38.95,144.93 h1.52
  text "INITIAL RELEASE" at 32.17,144.93 h1.52
  text "*" at 44.87,144.93 h1.52
  text "1" at 60.11,144.93 h1.52
  text "A" at -54.825,129.614 h1.52
  text "A" at 219.495,129.614 h1.52
  text "B" at -54.825,75.639 h1.52
  text "B" at 219.495,75.639 h1.52
  text "C" at -54.825,21.664 h1.52
  text "C" at 219.495,21.664 h1.52
  text "TITLE:" at 22.01,-23.98 h1.52
  text "ENGINEER:" at 60.11,-23.98 h1.52
  text "Brinton Engineering LLC" at 94.4,-25.885 h1.52
  text "ALL DIMENSIONS ARE IN MM (INCHES)" at 130.595,-25.885 h1.52
  text "*" at 60.11,-27.155 h1.52
  text "3479 Edison Way" at 94.4,-28.425 h1.52
  text "TOLERANCES:" at 119.546,-30.076 h1.52
  text "*" at 21.375,-30.965 h1.52
  text "Menlo Park CA 94025" at 94.4,-30.965 h1.52
  text "PCB DESIGNER:" at 60.11,-31.473 h1.52
  text "D" at -54.825,-32.184 h1.52
  text "D" at 219.495,-32.184 h1.52
  text "DECIMALS" at 130.595,-32.87 h1.52
  text "(877) 778-8435" at 94.4,-33.505 h1.52
  text "*" at 60.11,-34.775 h1.52
  text ".X     0.1" at 130.595,-36.045 h1.52
  text ".XX    0.05" at 130.595,-38.585 h1.52
  text "REV:" at -31.33,-39.22 h1.52
  text "PART NO.:" at 22.01,-39.22 h1.52
  text "DATE:" at 60.11,-39.22 h1.52
  text ".XXX   0.005" at 130.595,-41.125 h1.52
  text "1" at -31.33,-42.395 h1.52
  text "-" at 22.01,-42.395 h1.52
  text "*" at 60.11,-42.395 h1.52
  text "SCALE:" at -31.33,-46.84 h1.52
  text "DWG NO:" at 22.01,-46.84 h1.52
  text "FILE NAME:" at 60.11,-46.84 h1.52
  text "*UNLESS OTHERWISE NOTED" at 131.23,-46.84 h1.52
  text ".PCB_FILE_NAME_NO_PATH" at 58.84,-49.888 h1.52
  text "1:1" at -31.33,-50.015 h1.52
  text "-" at 22.01,-50.015 h1.52
  text "4" at -22.389,-55.349 h1.52
  text "3" at 47.486,-55.349 h1.52
  text "2" at 117.209,-55.349 h1.52
  text "1" at 187.076,-55.349 h1.52